# Allegro board CH340E_TEST_V10.brd
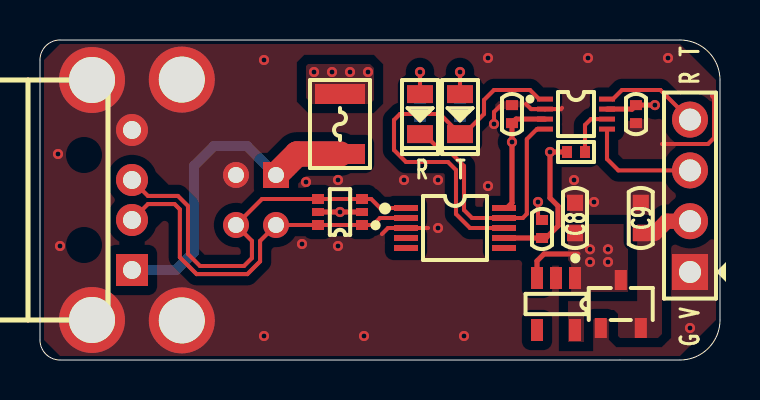
[diagram p0: board, top side]
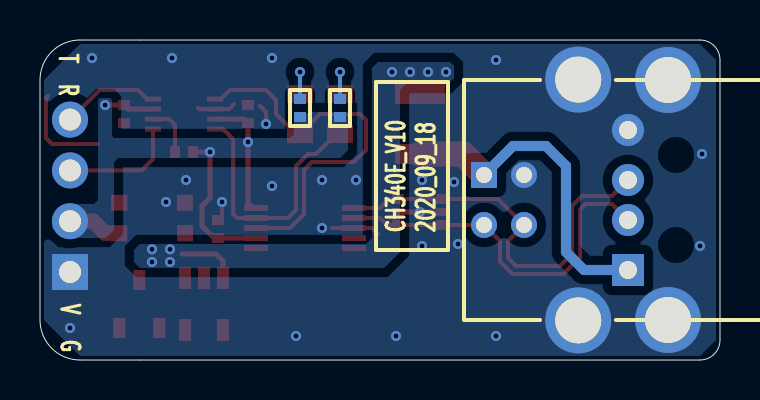
[diagram p1: board, bottom side, seen from below]

Outline 34 x 16 mm; copper layers: TOP, BOTTOM. Coordinates in mm from the lower left corner of the outline.
Outline path: 0,15 0,1 arc(0.29,0.29) 1,0 32,0 arc(33.41,0.59) 34,2 34,14 arc(33.41,15.41) 32,16 1,16 arc(0.29,15.71) 0,15

## Design rules (mm)
constraint set DEFAULT: min track width 0.203, pair gap 0.203
net group USB_D: nets USB_DM USB_DP

## Placement (name value [footprint] x y rotation side)
C5  100nF_50V  [C0402]  25.1 6.55 270 top
C8  10uF_10V  [C0603]  26.75 7.1 270 top
C9  10uF_10V  [C0603]  30.04 7.1 90 top
C11  100nF_50V  [C0402]  23.6 12.3 270 top
C12  100nF_50V  [C0402]  29.8 12.3 90 top
D1  LED_RED  [LED0805]  21 12.3 270 top
D2  LED_GREEN  [LED0805]  19 12.3 270 top
F1  SMD1210-200  [FUSE1210]  15 11.8 90 top
J1  -  [CN1X4-2P54-Z]  32.5 4.4 90 top
NOREF  -  []  0 0 90 top
NOREF#2  -  []  0 0 0 top
R1  4.7K  [R0402]  21 12.6 270 bottom
R2  4.7K  [R0402]  19 12.6 270 bottom
R4  10K  [R0402]  26.8 10.4 180 top
U1  CH340E  [MSOP10]  20.75 6.6 270 top
U2  TPD4E1U06DCKR  [SOT363]  15 7.4 90 top
U4  XC6206P332MR  [SOT23-3]  29.04 2.8 0 top
U6  SPX3819M5-L-3-3/NI  [SOT23-5]  25.8 2.8 180 top
U7  TXS0102DCUR  [VSSOP8]  26.8 12.3 270 top
USB1  -  [USB-A-MALE]  4.8 8 180 top
USB2  -  [USB-B]  11.8 8 180 bottom

## Library data of the parts
C5 C11 C12 = CAP NP_2
C8 C9 = CAP NP
D1 D2 = LED_4
F1 = FUSE
J1 = CONN RCPT 4
R1 R2 R4 = R_Generic
U1 = CH340E
U2 = TPD4E1U06DBVR
U4 = XC6206P332MR
U6 = SPX3819M5-L-1-2
U7 = TXB0102DCUR
USB1 = USB-A-MALE
USB2 = USB-B

## Footprints (pads in the part's own frame, mm; a bottom-side part is the same pattern mirrored in y, then rotated)
C0402
  rect 0.5x0.6 smd: 1(-0.45,0) 2(0.45,0)
C0603
  rect 0.8x0.8 smd: 1(-0.762,0) 2(0.762,0)
CN1X4-2P54-Z
  rect 1.8x1.8 hole 1.1: 1(0,0)
  round 1.8 hole 1.1: 2(2.54,0) 3(5.08,0) 4(7.62,0)
FUSE1210
  rect 1x2.5 smd: 1(-1.5,0) 2(1.5,0)
LED0805
  rect 0.9x1.3 smd: 1(-1,0) 2(1,0)
MSOP10
  rect 0.3x1.2 smd: 1(-1,-2.45) 2(-0.5,-2.45) 3(0,-2.45) 4(0.5,-2.45) 5(1,-2.45) 6(1,2.45) 7(0.5,2.45) 8(0,2.45) 9(-0.5,2.45) 10(-1,2.45)
R0402
  rect 0.5x0.6 smd: 1(-0.45,0) 2(0.45,0)
SOT23-3
  rect 0.6x1 smd: 1(-1,-1.2) 2(1,-1.2) 3(0,1.2)
SOT23-5
  rect 0.6x1.1 smd: 1(-0.95,-1.3) 2(0,-1.3) 3(0.95,-1.3) 4(0.95,1.3) 5(-0.95,1.3)
SOT363
  rect 0.5x0.6 smd: 1(-0.65,-1.1) 3(0.65,-1.1) 4(0.65,1.1) 6(-0.65,1.1)
  rect 0.4x0.6 smd: 2(0,-1.1) 5(0,1.1)
USB-A-MALE
  rect 1.6x1.6 hole 0.9: 1(0.2,3.5)
  round 1.6 hole 0.9: 2(0.2,1) 3(0.2,-1) 4(0.2,-3.5)
  round 3.3 hole 2.3: 5(2.2,6) 6(2.2,-6)
USB-B
  rect 1.3x1.3 hole 0.8: 1(0,1.25)
  round 1.3 hole 0.8: 2(0,-1.25) 3(2,-1.25) 4(2,1.25)
  round 3.3 hole 2.3: 5(4.71,6.02) 6(4.71,-6.02)
VSSOP8
  rect 0.25x0.8 smd: 1(-0.75,-1.55) 2(-0.25,-1.55) 3(0.25,-1.55) 4(0.75,-1.55) 5(0.75,1.55) 6(0.25,1.55) 7(-0.25,1.55) 8(-0.75,1.55)

## Nets
GND: C5.1 C8.1 C9.2 C11.1 C12.1 J1.1 U1.3 U2.2 U2.5(NC) U4.1(VSS) U6.2 U7.2 USB1.4 USB1.5 USB1.6 USB2.4 USB2.5 USB2.6
VCC_3.3V: C5.2 C9.1 C11.2 C12.2 J1.2 R1.2 R2.2 R4.2 U1.7(VCC) U1.10 U4.2 U6.5(VOUT) U7.3 U7.7(VCCB)
VCC_USB: C8.2 F1.2 U4.3 U6.1 U6.3
CH340E_RXD: D2.2(CATHODE) U1.9 U7.4
CH340E_TXD: D1.2(CATHODE) U1.8 U7.1
RXD: J1.3 U7.5
TXD: J1.4 U7.8
USB_DM: U1.2 U2.1 U2.6 USB1.2 USB2.2
USB_DP: U1.1 U2.3 U2.4 USB1.3 USB2.3
N17444119: D1.1 R1.1
N17444179: D2.1 R2.1
N17494883: F1.1 USB1.1(VBUS) USB2.1(VBUS)
N17507206: R4.1 U7.6

Pads without a net: U1 4 5 6; U6 4

## Via types
v1: diameter 0.508, hole 0.254, TOP to BOTTOM, 36 vias

## Routing (per net, layer and track width the routed paths; a pad name or vN(x,y) marks a point on that pad's centre or on a via; arc(x,y) is an arc through that point)
GND: length 13.4
  TOP w0.203: 24.3,12.8 24.55,12.55 U7.2 26.05,12.55 26.1,12.6 ; 31.1,10.8 33.4,10.8 33.7,11.1 33.7,13.1 33.6,13.2 ; 23,12.7 22.7,12.4 v1(22.7,11.8) ; v1(24.9,7.9) 24.9,7.2 C5.1 ; 19.4,6.6 U1.3 17.4,6.6 17.1,6.3
  TOP w0.254: U2.2 v1(15,7.4) U2.5
  vias: v1(0.9,10.3) v1(1,5.7) v1(11.2,15) v1(11.2,1.2) v1(13.1,5.8) v1(13.3,8.9) v1(14.9,9) v1(14.9,5.7) v1(16.2,1.2) v1(18.2,9) v1(19.9,9) v1(19.9,6.6) v1(21.2,1.2) v1(22.4,15.1) v1(22.4,8.7) v1(26.7,9) v1(27.4,15.1) v1(27.7,7.9) v1(31.4,15.1) v1(32.5,1.6)
VCC_3.3V: length 19.1
  TOP w0.254: U1.7 C5.2 25.3,6.1 25.9,6.7 25.9,7.7 25.5,8.1 v1(25.5,10.4) R4.2 ; v1(30.75,12.75) C12.2 29.6,12.55 U7.7 ; U1.10 23.35,7.6 23.6,7.85 v1(23.6,10.9) C11.2 23.8,12.05 U7.3
  TOP w0.762: C9.1 30.74,6.34 31.34,6.94 J1.2
VCC_USB: length 3
  TOP w0.254: 26.9,5.3 25.2,5.3 24.85,4.95 U6.3
  vias: v1(13.7,14.4) v1(14.6,14.4) v1(15.5,14.4) v1(16.4,14.4) v1(27.5,5.54) v1(27.5,4.9) v1(28.4,5.54) v1(28.4,4.9)
CH340E_RXD: length 13.3
  TOP w0.203: U7.4 24.85,11.55 24.34,11.04 24.34,7.3 24.14,7.1 U1.9 21.6,7.1 21.2,7.5 21.2,9.7 20.6,10.3 20.2,10.3 19.5,11 19.3,11 D2.2
CH340E_TXD: length 19.5
  TOP w0.203: U1.8 21.5,6.6 20.8,7.3 20.8,9.5 20.4,9.9 18.3,9.9 17.7,10.5 17.7,12 18,12.3 20,12.3 D1.2 21.2,11.3 22.2,12.3 22.2,13 22.7,13.5 24.5,13.5 24.95,13.05 U7.1
RXD: length 5.9
  TOP w0.203: J1.3 28.92,9.48 28.35,10.05 U7.5
TXD: length 5
  TOP w0.203: J1.4 31.02,13.5 29.1,13.5 28.65,13.05 U7.8
USB_DM: length 18.6
  TOP w0.203: U1.2 17,7.1 16.65,6.75 U2.1 U2.6 USB2.2 11,5.95 11,4.93 10.37,4.29 7.83,4.29 6.99,5.13 6.99,7.53 6.73,7.8 5.4,7.8 USB1.2
USB_DP: length 20.6
  TOP w0.203: U1.1 17.01,7.6 16.56,8.05 U2.3 U2.4 11.1,8.05 USB2.3 10.6,5.95 10.6,5.1 10.2,4.7 8,4.7 7.4,5.3 7.4,7.7 6.9,8.2 5.4,8.2 USB1.3
N17444119: length 2.5
  TOP w0.203: D1.1 v1(21,14.4)
  BOTTOM w0.203: v1(21,14.4) R1.1
N17444179: length 2.5
  TOP w0.203: D2.1 v1(19,14.4)
  BOTTOM w0.203: v1(19,14.4) R2.1
N17494883: length 16.5
  TOP w1.27: USB2.1 12.85,10.3 F1.1
  BOTTOM w0.508: USB2.1 10.35,10.7 8.7,10.7 7.7,9.7 7.7,5.4 6.8,4.5 USB1.1
N17507206: length 2.6
  TOP w0.203: R4.1 27.25,11.75 27.55,12.05 U7.6

## Copper pours and planes (outline as drawn; the poured copper is in the pictures)
GND on TOP, BOTTOM: 0.2,15 1,15.8 32,15.8 33.8,14 33.8,2 32,0.2 1,0.2 0.2,1
VCC_3.3V on TOP: 29.6,6.8 30.9,6.8 31.1,6.6 31.1,1.3 30.9,1.1 29,1.1 28.9,1.2 28.9,2.3 28.7,2.5 27.5,2.5 27.2,2.2 27.2,0.9 26.4,0.9 26.4,3 26.6,3.2 29.4,3.2 29.6,3.4
VCC_3.3V on BOTTOM: 18.6,12.4 18.6,10.5 19,10.1 30.1,10.1 30.3,9.9 30.3,6.5 30.7,6.1 32.9,6.1 33.4,6.6 33.4,7.2 32.8,7.8 31.3,7.8 31.1,8 31.1,13 31,13.1 30.5,13.1 30.4,13 30.4,11.2 30.3,11.1 21.5,11.1 21.3,11.3 21.3,12.4
VCC_USB on TOP: 26.4,6.8 29.2,6.8 29.4,6.6 29.4,3.4 26.5,3.4 26.4,3.5
VCC_USB on TOP: 13.6,12.8 16.5,12.8 16.7,13 16.7,14.6 16.5,14.8 13.4,14.8 13.3,14.7 13.3,13.1
VCC_USB on BOTTOM: 29,5.8 29.3,5.5 29.3,4.9 29,4.6 16.8,4.6 16,5.4 16,13.5 15.7,13.8 13.6,13.8 13.3,14.1 13.3,14.7 13.5,14.9 17.1,14.9 17.4,14.6 17.4,6.1 17.7,5.8

## Text on the board
Ref Des/Silkscreen Bottom: V | G | T | R | 2020_09_18 | CH340E_V10
Ref Des/Silkscreen Top: R | T | V | G
BODY_CENTER: FIGURE | FINISHED_SIZE | 0.254 | 0.8 | 0.9 | 1.1 | 2.3 | DRILL CHART: TOP to BOTTOM | ALL UNITS ARE IN MILLIMETERS | PLATED | QTY | 36 | 4 | 3 | 1 | 52 | TOTAL HOLES:
